# Altium PCB Node_1.PcbDoc
Units mm, origin at the board's own origin, x right, y up, seen from the top; angles counter-clockwise.
Board outline 100.8 x 72.5 mm, 2 copper layers (Top Layer, Bottom Layer), stack 0.325 mm thick; 104 components, 99 nets, 447 pads, 16 vias.
Unrouted connection lines stored in the file: 1.
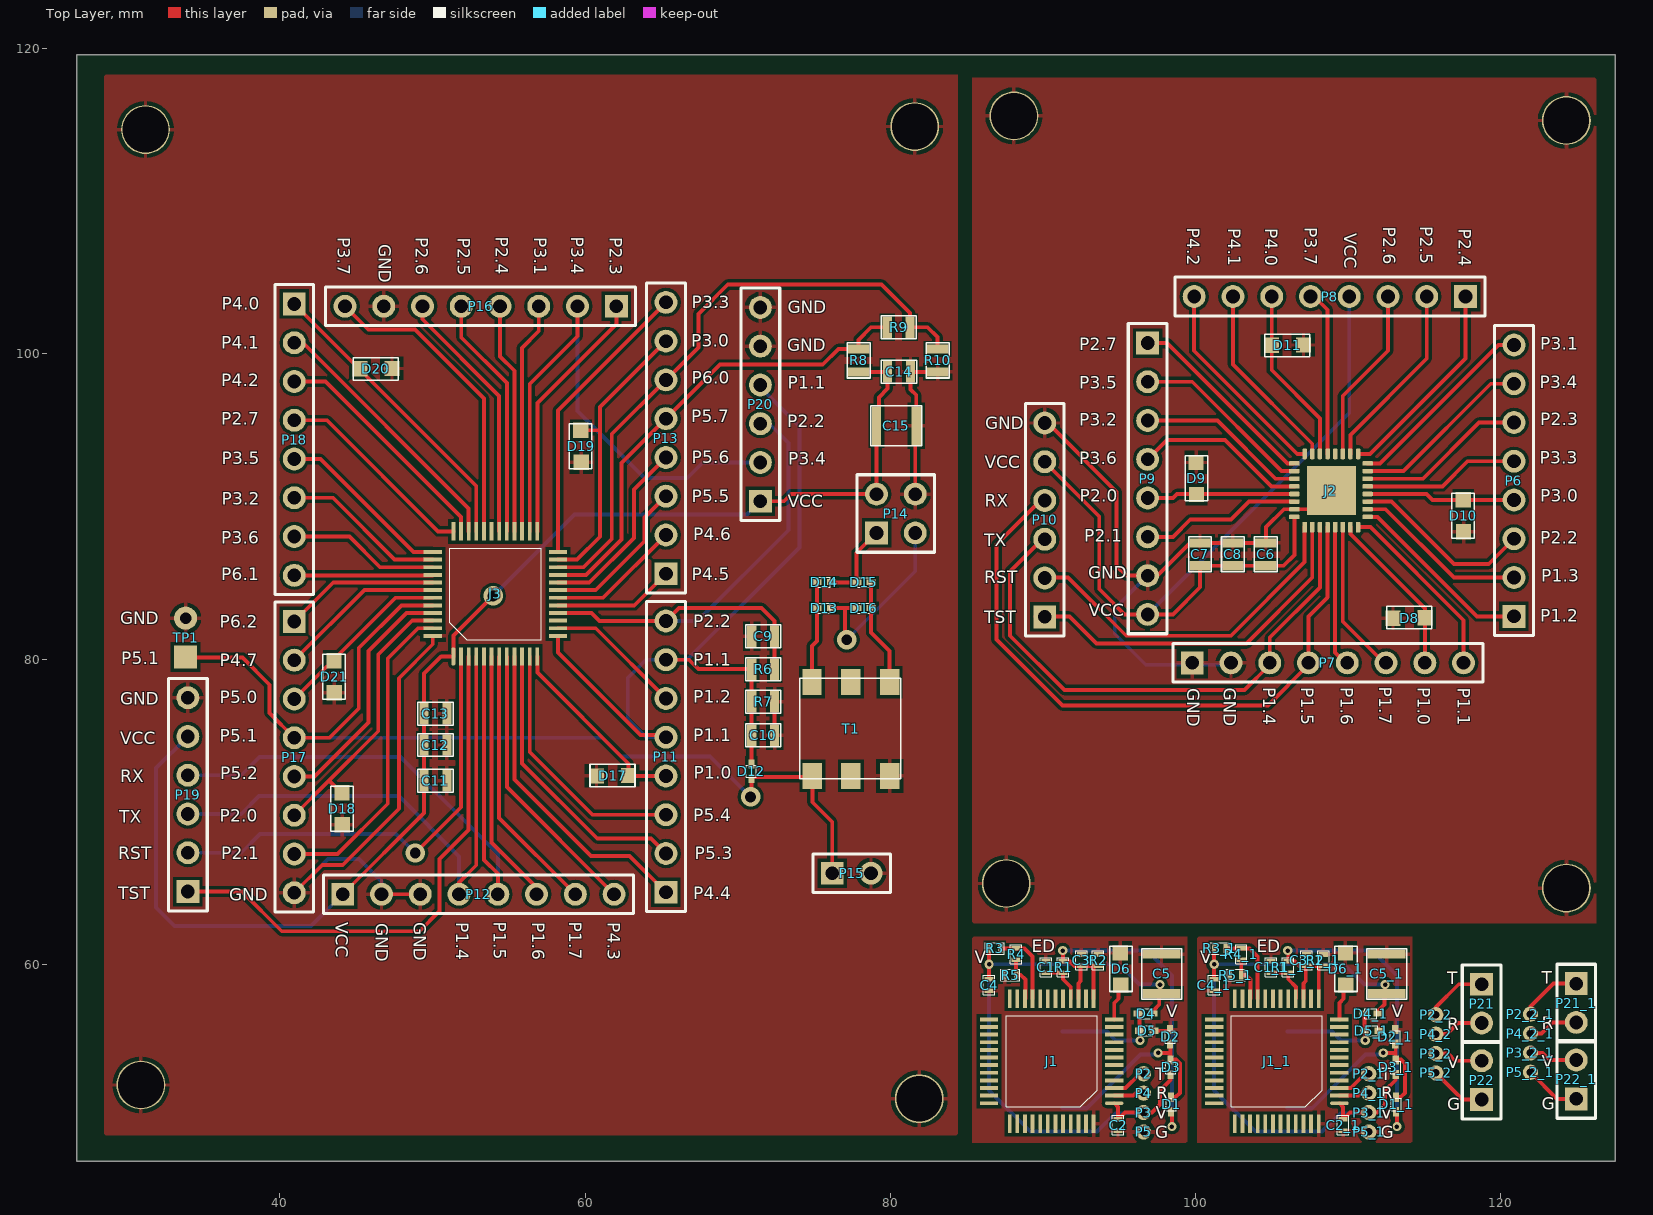
[diagram p0: Top Layer view]
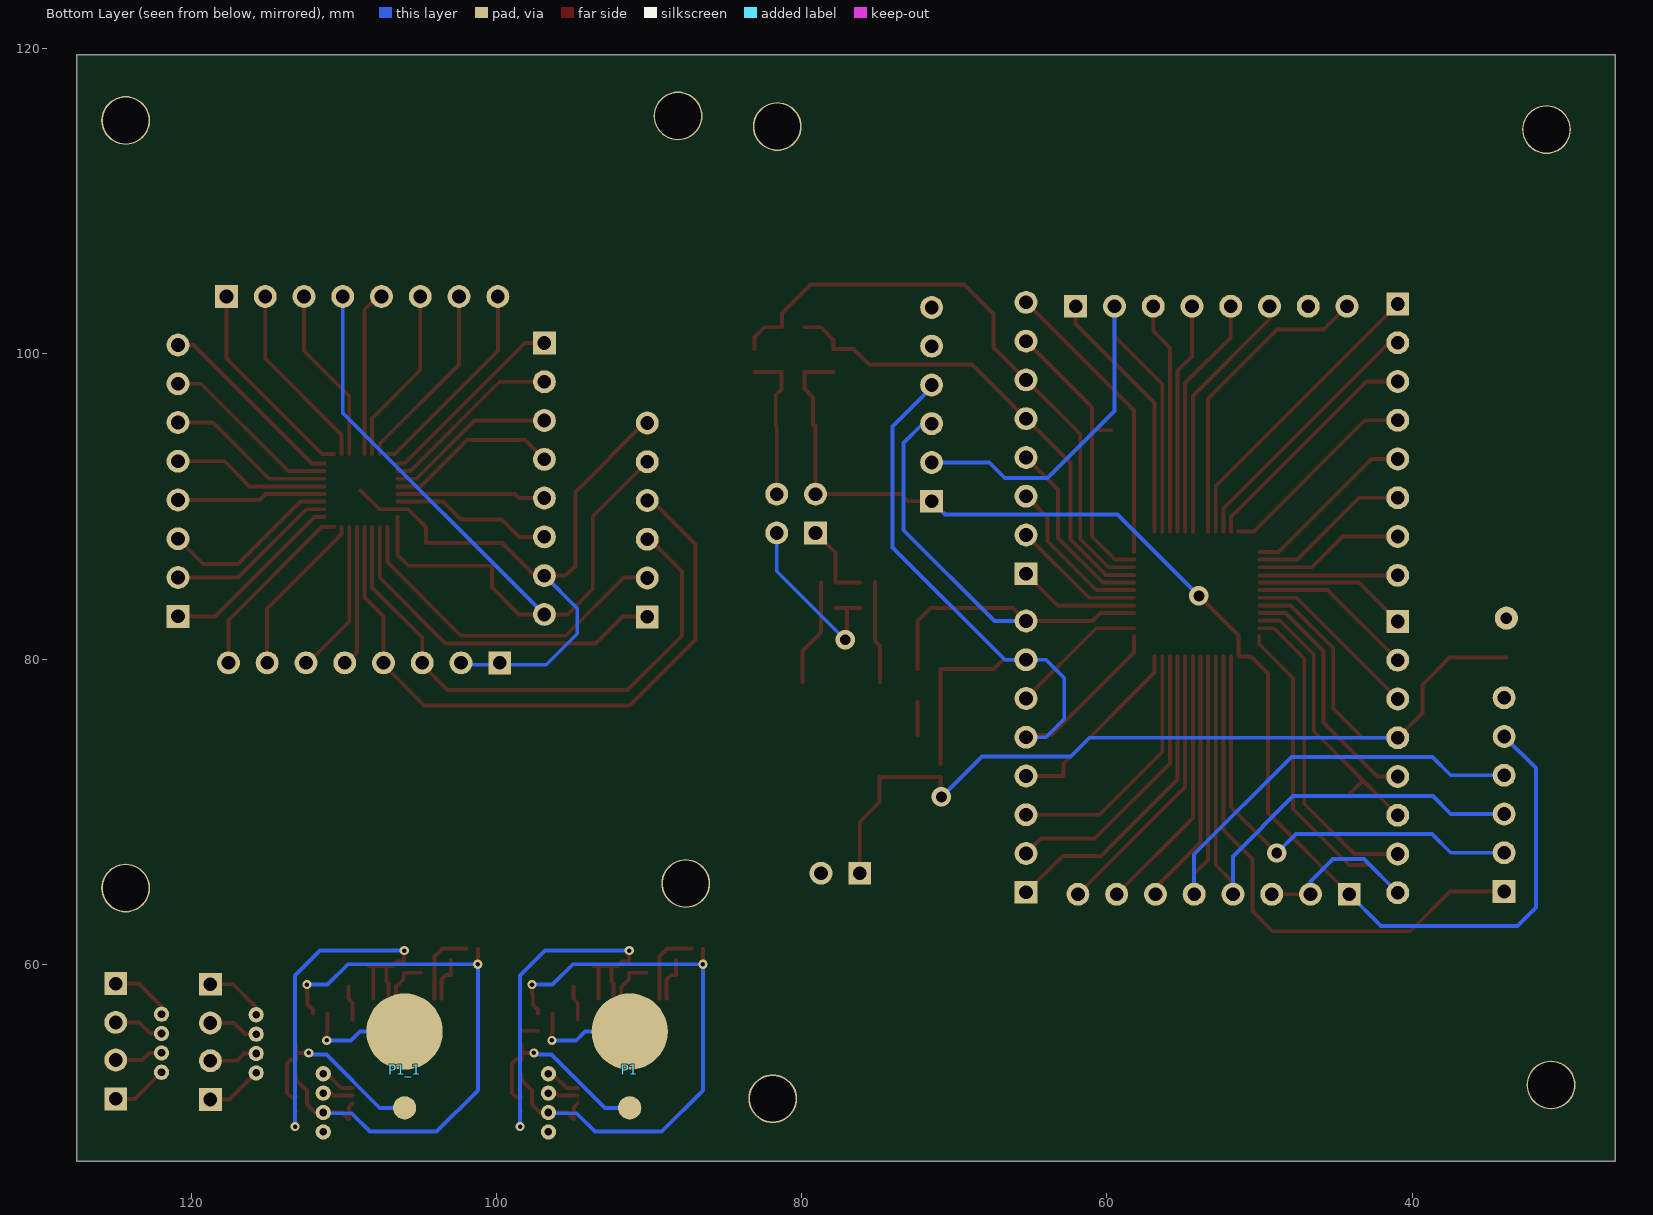
[diagram p1: Bottom Layer view, seen from below]

## Layer stack, top to bottom
Top Solder: solder mask 0.0102, Solder Resist, Dk 3.5
Top Layer: signal copper 0.0356
Dielectric 1: core 0.254, FR-4, Dk 4.2
Bottom Layer: signal copper 0.0356
Bottom Solder: solder mask 0.0102, Solder Resist, Dk 3.5

## Board outline
26.7,47.1 127.5,47.1 127.5,119.6 26.7,119.6

## Design rules (kind name [scope] priority, off if disabled: settings)
Clearance [All] p1: gap=0.2 except(0.1: Arc-Arc Arc-Track Arc-Via Arc-SMDPad THPad-Via Via-Via Track-SMDPad Track-Track SMDPad-Via Track-Via Arc-THPad Track-THPad SMDPad-SMDPad THPad-THPad SMDPad-THPad)
PolygonConnect [All] p1: connectstyle=Relief reliefconductorwidth=0.254 reliefentries=4 polygonreliefangle="90 Angle" airgapwidth=0.254
RoutingVias [All] p1: holewidth=0.711 width=1.27 viastyle="Through Hole" minholewidth=0.2 minwidth=0.5 maxholewidth=1 maxwidth=2
SolderMaskExpansion [All] p1: expansion=0.102
UnpouredPolygon [All] p1: allowunpoured=FALSE
Width [All] p1: maxlimit=1 minlimit=0.127 preferedwidth=0.254
29 further rules are at their usual default settings.

## Components (designator, comment, footprint, x,y, rotation, side; value= is the part's Value field where it differs from the comment)
C1 "Cap" 0402 90.2,59.825 r270 top
C1_1 "Cap" 0402 104.95,59.825 r270 top (schematic designator C1)
C2 "Cap" 0402 94.925,49.475 r90 top
C2_1 "Cap" 0402 109.675,49.475 r90 top (schematic designator C2)
C3 "Cap" 0402 92.525,60.275 r270 top
C3_1 "Cap" 0402 107.275,60.275 r270 top (schematic designator C3)
C4 "Cap" 0402 86.475,58.65 r90 top
C4_1 "Cap" 0402 101.225,58.65 r90 top (schematic designator C4)
C5 "Cap" 1210 97.775,60.675 r270 top
C5_1 "Cap" 1210 112.525,60.675 r270 top (schematic designator C5)
C6 "Cap" 0805 104.613,86.872 r270 top
C7 "Cap" 0805 100.295,86.872 r270 top
C8 "Cap" 0805 102.454,86.872 r270 top
C9 "Cap" 0805 71.675,81.5 r0 top
C10 "Cap" 0805 71.675,75.025 r180 top
C11 "Cap" 0805 50.2,72.025 r180 top
C12 "Cap" 0805 50.2,74.375 r180 top
C13 "Cap" 0805 50.2,76.425 r180 top
C14 "Cap" 0805 80.575,98.825 r180 top
C15 "Cap" 1210 81.7,95.3 r180 top
D1 "D Schottky" Diode2 98.4,51.225 r270 top
D1_1 "D Schottky" Diode2 113.15,51.225 r270 top (schematic designator D1)
D2 "D Schottky" Diode2 98.34,55.65 r270 top
D2_1 "D Schottky" Diode2 113.09,55.65 r270 top (schematic designator D2)
D3 "D Schottky" Diode2 98.375,53.65 r270 top
D3_1 "D Schottky" Diode2 113.125,53.65 r270 top (schematic designator D3)
D4 "D Schottky" Diode2 96.325,56.775 r0 top
D4_1 "D Schottky" Diode2 111.075,56.775 r0 top (schematic designator D4)
D5 "D Schottky" Diode2 97.2,55.65 r180 top
D5_1 "D Schottky" Diode2 111.95,55.65 r180 top (schematic designator D5)
D6 "LED3" LED_mini 95.075,60.7 r270 top
D6_1 "LED3" LED_mini 109.825,60.7 r270 top (schematic designator D6)
D8 "LED3" LED_mini 112.995,82.681 r0 top
D9 "LED3" LED_mini 100.041,92.841 r270 top
D10 "LED3" LED_mini 117.567,88.396 r90 top
D11 "LED3" LED_mini 107.026,100.588 r180 top
D12 "D Schottky" Diode2 70.9,72.25 r90 top
D13 "D Schottky" Diode2 76.075,83.35 r180 top
D14 "D Schottky" Diode2 75.275,85.05 r0 top
D15 "D Schottky" Diode2 78.675,85.025 r180 top
D16 "D Schottky" Diode2 77.875,83.35 r0 top
D17 "LED3" LED_mini 60.8,72.35 r0 top
D18 "LED3" LED_mini 44.1,69.2 r90 top
D19 "LED3" LED_mini 59.75,92.95 r90 top
D20 "LED3" LED_mini 47.3,99.05 r180 top
D21 "LED3" LED_mini 43.575,77.85 r90 top
J1 "MCU" LQFP48 94.675,50.9 r180 top
J1_1 "MCU" LQFP48 109.425,50.9 r180 top (schematic designator J1)
J2 "MCU" VQFN32 107.153,88.65 r90 top
J3 "MCU" LQFP48 51.375,80.175 r90 top
P1 "Header 2" PZT1 91.275,50.6 r90 bottom
P1_1 "Header 2" PZT1 106.025,50.6 r90 bottom (schematic designator P1)
P2 "Header1" "Header 1"#1 100.35,54.225 r0 top
P2_1 "Header1" "Header 1"#1 115.1,54.225 r0 top (schematic designator P2)
P2_2 "Header1" "Header 1"#1 119.5,58.09 r0 top (schematic designator P2)
P2_2_1 "Header1" "Header 1"#1 125.7,58.13 r0 top (schematic designator P2)
P3 "Header1" "Header 1"#2 96.675,50.725 r0 top
P3_1 "Header1" "Header 1"#2 111.425,50.725 r0 top (schematic designator P3)
P3_2 "Header1" "Header 1"#2 115.825,54.59 r0 top (schematic designator P3)
P3_2_1 "Header1" "Header 1"#2 122.025,54.63 r0 top (schematic designator P3)
P4 "Header1" "Header 1"#3 97.575,52.575 r0 top
P4_1 "Header1" "Header 1"#3 112.325,52.575 r0 top (schematic designator P4)
P4_2 "Header1" "Header 1"#3 116.725,56.44 r0 top (schematic designator P4)
P4_2_1 "Header1" "Header 1"#3 122.925,56.48 r0 top (schematic designator P4)
P5 "Header1" "Header 1"#4 96.65,49.25 r0 top
P5_1 "Header1" "Header 1"#4 111.4,49.25 r0 top (schematic designator P5)
P5_2 "Header1" "Header 1"#4 115.8,53.115 r0 top (schematic designator P5)
P5_2_1 "Header1" "Header 1"#4 122,53.155 r0 top (schematic designator P5)
P6 "Header 8" HDR1X8 120.869,82.808 r90 top
P7 "Header 8" HDR1X8 99.787,79.76 r0 top
P8 "Header 8" HDR1X8 117.694,103.763 r180 top
P9 "Header 8" HDR1X8 96.866,100.715 r270 top
P10 "Header 6" HDR1X6 90.125,82.775 r90 top
P11 "Header 8" HDR1X8 65.3,64.725 r90 top
P12 "Header 8" HDR1X8 44.125,64.6 r0 top
P13 "Header 8" HDR1X8 65.3,85.6 r90 top
P14 "Header 2X2" HDR2X2 79.1,88.275 r0 top
P15 "Header 2" HDR1X2 76.2,65.975 r0 top
P16 "Header 8" HDR1X8 62.05,103.125 r180 top
P17 "Header 8" HDR1X8 40.95,82.475 r270 top
P18 "Header 8" HDR1X8 40.95,103.275 r270 top
P19 "Header 6" HDR1X6 33.975,64.775 r90 top
P20 "Header 6" HDR1X6 71.487,90.35 r90 top
P21 "Header 2" HDR1X2 118.75,58.7 r270 top (schematic designator P15)
P21_1 "Header 2" HDR1X2 124.95,58.74 r270 top (schematic designator P15)
P22 "Header 2" HDR1X2 118.75,51.15 r90 top (schematic designator P15)
P22_1 "Header 2" HDR1X2 124.95,51.19 r90 top (schematic designator P15)
R1 "Res1" 0402 91.325,59.825 r270 top
R1_1 "Res1" 0402 106.075,59.825 r270 top (schematic designator R1)
R2 "Res1" 0402 93.625,60.275 r90 top
R2_1 "Res1" 0402 108.375,60.275 r90 top (schematic designator R2)
R3 "Res1" 0402 86.85,61.05 r180 top
R3_1 "Res1" 0402 101.6,61.05 r180 top (schematic designator R3)
R4 "Res1" 0402 88.25,60.675 r90 top
R4_1 "Res1" 0402 103,60.675 r90 top (schematic designator R4)
R5 "Res1" 0402 87.875,59.3 r180 top
R5_1 "Res1" 0402 102.625,59.3 r180 top (schematic designator R5)
R6 "Res1" 0805 71.675,79.35 r0 top
R7 "Res1" 0805 71.675,77.2 r0 top
R8 "Res1" 0805 77.925,99.575 r270 top
R9 "Res1" 0805 80.55,101.75 r180 top
R10 "Res1" 0805 83.1,99.575 r270 top
T1 "Transformer" Transformer1 74.875,72.5 r90 top
TP1 "Test_Point" Test_Point 33.825,80.15 r90 top

## Footprints (in the part's own frame and the unit in brackets; to place one, negate y for a bottom-side part, rotate by r counter-clockwise, add the part's x,y. Pads: shape width x height; smd on the part's side, far side on the other; paste and mask are expansions set on the pad)
0402 [mm]
  rect 0.3x0.6 smd: 1(-0.375,0) 2(0.375,0)
  silkscreen extent -0.63,-0.38 0.63,0.38
0805 [mm]
  rect 0.6x1.4 smd: 1(-0.75,0) 2(0.75,0)
  silkscreen extent -1.15,-0.75 1.15,0.75
1210 [mm]
  rect 0.6x2.5 smd: 1(0,0) 2(2.6,0)
  silkscreen extent -0.36,-1.3 2.97,1.32
Diode2 [mm] "PMEG2010AEB"
  rect 0.6x0.4 smd mask+0.05: 1(-0.075,0) 2(0.875,0)
  silkscreen extent 0,-0.32 0.8,0.33
HDR1X2 [mm] "Connector; Header; 2 Position"
  rect 1.5x1.5 hole 0.9: 1(0,0)
  round 1.5 hole 0.9: 2(2.54,0)
  silkscreen extent -1.27,-1.27 3.81,1.27
HDR1X6 [mm] "Connector; Header; 6 Position"
  rect 1.5x1.5 hole 0.9: 1(0,0)
  round 1.5 hole 0.9: 2(2.54,0) 3(5.08,0) 4(7.62,0) 5(10.16,0) 6(12.7,0)
  silkscreen extent -1.27,-1.27 13.97,1.27
HDR1X8 [mm] "Connector; Header; 8 Position"
  rect 1.5x1.5 hole 0.9: 1(0,0)
  round 1.5 hole 0.9: 2(2.54,0) 3(5.08,0) 4(7.62,0) 5(10.16,0) 6(12.7,0) 7(15.24,0) 8(17.78,0)
  silkscreen extent -1.27,-1.27 19.05,1.27
HDR2X2 [mm] "Connector; Header; 2x2 Position"
  rect 1.5x1.5 hole 0.9: 1(0,0)
  round 1.5 hole 0.9: 2(0,2.54) 3(2.54,0) 4(2.54,2.54)
  silkscreen extent -1.27,-1.27 3.81,3.81
"Header 1"#1 [mm]
  round 1 hole 0.5 mask+0.05: 1(-3.75,-1.39)
"Header 1"#2 [mm]
  round 1 hole 0.5 mask+0.05: 1(-0.075,-0.43)
"Header 1"#3 [mm]
  round 1 hole 0.5 mask+0.05: 1(-0.975,-1.01)
"Header 1"#4 [mm]
  round 1 hole 0.5 mask+0.05: 1(-0.05,-0.225)
LED_mini [mm]
  rect 1x1 smd: 1(-0.05,0) 2(2.05,0.025)
  silkscreen extent -0.48,-0.7 2.47,0.77
LQFP48 [mm]
  oval 1.2x0.25 smd mask+0.05: 1(0,0)
  rect 1.2x0.25 smd mask+0.05: 2(0,-0.5) 3(0,-1) 4(0,-1.5) 5(0,-2) 6(0,-2.5) 7(0,-3) 8(0,-3.5) 9(0,-4) 10(0,-4.5) 11(0,-5) 12(0,-5.5) 25(8.2,-5.5) 26(8.2,-5) 27(8.2,-4.5) 28(8.2,-4) 29(8.2,-3.5) 30(8.2,-3) 31(8.2,-2.5) 32(8.2,-2) 33(8.2,-1.5) 34(8.2,-1) 35(8.2,-0.5) 36(8.2,0)
  rect 0.25x1.2 smd mask+0.05: 13(1.35,-6.85) 14(1.85,-6.85) 15(2.35,-6.85) 16(2.85,-6.85) 17(3.35,-6.85) 18(3.85,-6.85) 19(4.35,-6.85) 20(4.85,-6.85) 21(5.35,-6.85) 22(5.85,-6.85) 23(6.35,-6.85) 24(6.85,-6.85) 37(6.85,1.35) 38(6.35,1.35) 39(5.85,1.35) 40(5.35,1.35) 41(4.85,1.35) 42(4.35,1.35) 43(3.85,1.35) 44(3.35,1.35) 45(2.85,1.35) 46(2.35,1.35) 47(1.85,1.35) 48(1.35,1.35)
  silkscreen extent 1.11,-5.74 7.09,0.24
PZT1 [mm]
  round 1.524 smd: 1(0,0)
  round 5 smd: 2(5,0)
Test_Point [mil]
  rect 60x60 smd paste+0 mask+0: 1(0,0)
  round 60 hole 30: 2(100,0)
Transformer1 [mm]
  rect 1.7x1.27 smd: 1(-0.15,-0.025) 2(-0.15,-2.54) 3(-0.15,-5.08) 4(6,-5.08) 5(6,-2.54) 6(6,0)
  silkscreen extent -0.35,-5.82 6.25,0.8
VQFN32 [mm]
  rect 0.7x0.3 smd mask+0.05: 1(0,0)
  rrect50% 0.7x0.3 smd mask+0.05: 2(0,-0.5) 3(0,-1) 4(0,-1.5) 5(0,-2) 6(0,-2.5) 7(0,-3) 8(0,-3.5) 17(4.8,-3.5) 18(4.8,-3) 19(4.8,-2.5) 20(4.8,-2) 21(4.8,-1.5) 22(4.8,-1) 23(4.8,-0.5) 24(4.8,0)
  rrect50% 0.3x0.7 smd mask+0.05: 9(0.675,-4.125) 10(1.175,-4.125) 11(1.675,-4.125) 12(2.175,-4.125) 13(2.675,-4.125) 14(3.175,-4.125) 15(3.675,-4.125) 16(4.175,-4.125) 25(4.175,0.675) 26(3.675,0.675) 27(3.175,0.675) 28(2.675,0.675) 29(2.175,0.675) 30(1.675,0.675) 31(1.175,0.675) 32(0.675,0.675)
  rect 3.2x3.2 smd: 33(2.4,-1.75)

## Part data
C1 C1_1 C2 C2_1 C3 C3_1 C4 C4_1 C5 C5_1 C6 C7 C8 C9 C10 C11 C12 C13 C14 C15: "Capacitor"
D1 D1_1 D2 D2_1 D3 D3_1 D4 D4_1 D5 D5_1 D12 D13 D14 D15 D16: "Schottky Diode"
D6 D6_1 D8 D9 D10 D11 D17 D18 D19 D20 D21: "Typical BLUE SiC LED"
J1 J1_1 J3: library part MSP430FR2476_48pin, "MSP430FR2476"
J2: library part MSP430FR2476_32pin, "MSP430FR2476"
P1 P1_1 P15 P21 P21_1 P22 P22_1: "Header, 2-Pin"
P2 P2_1 P2_2 P2_2_1 P3 P3_1 P3_2 P3_2_1 P4 P4_1 P4_2 P4_2_1 P5 P5_1 P5_2 P5_2_1: library part "Header 1"
P6 P7 P8 P9 P11 P12 P13 P16 P17 P18: "Header, 8-Pin"
P10 P19 P20: "Header, 6-Pin"
P14: "Header, 2-Pin, Dual row"
R1 R1_1 R2 R2_1 R3 R3_1 R4 R4_1 R5 R5_1 R6 R7 R8 R9 R10: "Resistor"

## Free pads (board coordinates)
  round 3.2 hole 3: 0(30.9,52.1) 0(31.2,114.7) 0(81.6,114.9) 0(81.9,51.2) 0(87.6,65.3) 0(88.1,115.6) 0(124.3,65) 0(124.3,115.3)

## Via types
v1: diameter 0.6, hole 0.3, Top Layer to Bottom Layer, 12 vias
v2: diameter 1.27, hole 0.711, Top Layer to Bottom Layer, 4 vias

## Nets (pads, with @x,y where several pads share a name; then routed paths per layer and width w, separated by ;. In a path a pad name is that pad's centre, name@x,y a point inside that pad or via, vN(x,y) a via of type N, cw(c..) or ccw(c..) an arc to the next point about the centre after c; other vN are vias at no path point)
COMP_OUT: J1.26
ED1: C3.2 D1.2 J1.13 J1.15 R1.1 R2.1 | length 26.2
  Top Layer w0.254: v1(91.3,60.9) 91.325,60.875 R1.1 91.775,60.2 92.075,59.9 C3.2@92.475,59.9 ; J1.15 92.325,58.75 92.475,58.9 C3.2@92.475,59.9 ; J1.13 93.325,59.875 ; R2.1 C3.2 C3.2@92.475,59.9 ; D1.2 98.45,50.3 v1(98.45,49.375)
  Bottom Layer w0.254: v1(91.3,60.9) 96.825,60.9 98.45,59.275 v1(98.45,49.375)
ED2: C1.2 J1.16 R1.2 | length 3.1
  Top Layer w0.254: C1.2@90.175,59.45 R1.2 91.325,59.025 91.825,58.525 J1.16
GND: C1.1 C2.1 C3.1 C4.1 C5.1 D2.1 D5.1 D6.1 J1.48 P5.1 R2.2 R5.2 | length 1.1
  Top Layer w0.254: D5.1 D2.1@98.34,55.65
GND2: C9.1 C10.1 C11.1 C12.1 C13.1 C14.1 C15.1 D17.1 D18.1 D19.1 D20.1 D21.1 J3.48 P12.2 P12.3 P14.4 P15.2 P16.7 P17.8 P19.6 P20.5 P20.6 pad.0@30.9,52.1 pad.0@31.2,114.7 pad.0@81.6,114.9 pad.0@81.9,51.2 R7.2 R10.2 T1.3 TP1.2 | length 44
  Top Layer w0.254: P17.8 42.78,66.525 44.125,66.525 47.8,70.2 47.8,78.75 50.025,80.975 J3.48 ; P12.2 P12.3 ; C10.1 R7.2 ; P14.4 C15.1@81.64,95.24 ; C15.1 81.7,97.3 81.325,97.675 C14.1 R10.2
  Bottom Layer w0.254: P17.8 43.155,66.9 45.2,66.9 46.665,65.435 P12.2
GND3: C6.1 C7.1 C8.1 D8.1 D9.1 D10.1 D11.1 J2.31 J2.33 P7.1 P7.2 P9.7 P10.6 pad.0@87.6,65.3 pad.0@88.1,115.6 pad.0@124.3,65 pad.0@124.3,115.3 | length 42.5
  Top Layer w0.254: P10.6@89.5,95.508 90.292,95.508 94.834,90.966 94.834,86.11 95.469,85.475 P9.7 97.501,85.475 99.648,87.622 C7.1 C8.1 C6.1 104.613,88.65 105.788,89.825 J2.31 107.678,89.825 J2.33
  Bottom Layer w0.254: P9.7 94.707,83.316 94.707,81.665 96.739,79.633 P7.2@102.327,79.633
GND4: C1_1.1 C2_1.1 C3_1.1 C4_1.1 C5_1.1 D2_1.1 D5_1.1 D6_1.1 J1_1.48 P5_1.1 R2_1.2 R5_1.2
GND5: P5_2.1 P22.1 | length 3.7
  Top Layer w0.254: P5_2.1 117.49,51.15 P22.1@118.775,51.15
LED1: D6.2 J1.12 | length 2.3
  Top Layer w0.254: J1.12 94.675,57.475 94.95,57.75 D6.2@94.95,58.55
NetD1_1: D1.1 D2.2 D3.1 P1.1 | length 12.8
  Top Layer w0.254: v1(97.55,54.2) 98.325,54.2 ; D3.1 D3.1@98.375,53.76 ; D2.2@98.375,54.74 D3.1@98.375,53.76 ; D1.1 98.7,51.3 98.975,51.575 98.975,53.5 98.715,53.76 D3.1@98.375,53.76
  Bottom Layer w0.254: P1.1 92.9,50.6 96.4,54.1 v1@97.55,54.1
NetD4_1: D4.1 D5.2 P1.2 | length 7.1
  Top Layer w0.254: D4.1@96.325,56.775 D5.2 96.375,55.6 v1(96.375,55.025)
  Bottom Layer w0.254: P1.2 94.2,55.6 94.775,55.025 v1(96.375,55.025)
NetD13_1: D13.1 D16.1 P14.3 | length 12.6
  Top Layer w0.254: D13.1 77.025,83.35 ; v2(77.15,81.275) 77.025,81.4 77.025,83.35 ; D16.1 77.025,83.35
  Bottom Layer w0.254: v2(77.15,81.275) 81.64,85.765 P14.3
NetD13_2: D13.2 D14.1 T1.6 | length 6.7
  Top Layer w0.254: T1.6 74.875,80.875 75.2,81.2 D13.2 D14.1
NetD14_2: D14.2 D15.2 P14.1 | length 5.4
  Top Layer w0.254: D14.2@76.175,85.025 D15.2 77.8,86.975 P14.1
NetD15_1: D15.1 D16.2 T1.4 | length 7
  Top Layer w0.254: D15.1 D16.2 78.75,81.75 79.955,80.545 T1.4
P1.0: D17.2 J3.12 P11.4 | length 12.7
  Top Layer w0.254: J3.12 56.875,79.125 62.85,73.15 D17.2 ; D17.2@62.88,72.345 P11.4
P1.1: C10.2 D12.2 J3.13 J3.15 P11.5 P11.7 P20.4 R6.1 R7.1 | length 54.8
  Top Layer w0.254: J3.13 58.225,80.425 63.625,75.025 65.16,75.025 P11.5 ; P11.7 66.81,79.965 67.425,79.35 R6.1 ; D12.2 R6.1@70.9,79.325
  Bottom Layer w0.254: P11.5 63.99,74.885 62.8,76.075 62.8,78.775 63.99,79.965 P11.7 66.69,79.965 74.05,87.325 74.05,95.25 P20.4@71.33,97.97
P1.2: J3.14 P11.6 | length 9
  Top Layer w0.254: J3.14 60.7,82.025 P11.6
P1.4: J3.4 P12.4 P19.3 | length 38.4
  Top Layer w0.254: P12.4 51.745,65.37 52.875,66.5 J3.4
  Bottom Layer w0.254: P19.3 37.475,69.855 38.645,71.025 47.8,71.025 51.745,67.08 P12.4
P1.5: J3.5 P12.5 P19.4 | length 42
  Top Layer w0.254: J3.5 53.375,66.85 54.285,65.94 P12.5
  Bottom Layer w0.254: P19.4 37.475,72.395 38.68,73.6 47.9,73.6 54.285,67.215 P12.5
P1.6: J3.6 P12.6 | length 16.8
  Top Layer w0.254: J3.6 53.875,68 56.825,65.05 P12.6
P1.7: J3.7 P12.7 | length 17.6
  Top Layer w0.254: J3.7 54.375,69.59 P12.7
P2.0: D18.2 J3.46 P17.6 | length 18.5
  Top Layer w0.254: P17.6 43.225,72.05 ; D18.2 44.025,71.25 43.225,72.05 ; J3.46 48.675,82.525 46.45,80.3 46.45,75.275 43.225,72.05
P2.1: J3.47 P17.7 | length 20.8
  Top Layer w0.254: P17.7 43.785,67.235 47.075,70.525 47.075,80.05 49.05,82.025 J3.47
P2.2: C9.2 J3.16 P11.8 P20.3 R6.2 | length 36.8
  Top Layer w0.254: J3.16 60.425,83.025 60.945,82.505 P11.8 66.145,83.35 71.575,83.35 72.425,82.5 C9.2 R6.2
  Bottom Layer w0.254: P11.8 67.38,82.505 73.325,88.45 73.325,94.175 72.07,95.43 P20.3
P2.3: J3.25 P16.1 | length 16.9
  Top Layer w0.254: J3.25 56.875,96.775 62.05,101.95 P16.1
P2.4: J3.28 P16.4 | length 15.1
  Top Layer w0.254: P16.4 54.43,99.845 55.375,98.9 J3.28
P2.5: J3.29 P16.5 | length 16
  Top Layer w0.254: P16.5 51.89,101.085 54.875,98.1 J3.29
P2.6: J3.30 P16.6 | length 16.8
  Top Layer w0.254: P16.6 49.35,102.275 54.375,97.25 J3.30
P2.7: J3.36 P18.4 | length 13.4
  Top Layer w0.254: P18.4 43.095,95.655 50.375,88.375 J3.36
P3.0: D19.2 J3.23 P13.7 | length 19.2
  Top Layer w0.254: J3.23 59.475,86.525 60.975,88.025 60.975,96.515 P13.7 ; D19.2 60.95,95
P3.1: J3.27 P16.3 | length 15.2
  Top Layer w0.254: J3.27 55.875,100.4 56.97,101.495 P16.3
P3.2: J3.38 P18.6 | length 10.8
  Top Layer w0.254: P18.6 43.475,90.575 47.525,86.525 J3.38
P3.3: J3.24 P13.8 | length 19.3
  Top Layer w0.254: J3.24 58.225,96.305 P13.8
P3.4: J3.26 P16.2 P20.2 | length 37.1
  Top Layer w0.254: J3.26 56.375,98.025 59.51,101.16 P16.2
  Bottom Layer w0.254: P16.2 59.51,96.265 63.9,91.875 66.7,91.875 67.715,92.89 P20.2
P3.5: J3.37 P18.5 | length 11.6
  Top Layer w0.254: P18.5 42.66,93.115 48.75,87.025 J3.37
P3.6: J3.39 P18.7 | length 9.9
  Top Layer w0.254: P18.7 44.565,88.035 46.575,86.025 J3.39
P3.7: J3.32 P16.8 | length 20.3
  Top Layer w0.254: P16.8 45.795,101.6 48.85,101.6 53.375,97.075 J3.32
P4.0: D20.2 J3.33 P18.1 | length 19.8
  Top Layer w0.254: P18.1 52.875,91.35 J3.33
P4.1: J3.34 P18.2 | length 17.4
  Top Layer w0.254: P18.2 41.515,100.735 52.375,89.875 J3.34
P4.2: J3.35 P18.3 | length 15.5
  Top Layer w0.254: P18.3 43.005,98.195 51.875,89.325 J3.35
P4.3: J3.8 P12.8 | length 18.5
  Top Layer w0.254: J3.8 54.875,71.63 P12.8
P4.4: J3.9 P11.1 | length 21
  Top Layer w0.254: J3.9 55.375,72.125 60.4,67.1 62.925,67.1 P11.1
P4.5: J3.17 P13.1 | length 7.9
  Top Layer w0.254: J3.17 63.225,83.525 P13.1
P4.6: J3.18 P13.2 | length 8.8
  Top Layer w0.254: J3.18 61.185,84.025 P13.2
P4.7: J3.42 P17.2 | length 11
  Top Layer w0.254: P17.2 45.54,84.525 J3.42
P5.0: D21.2 J3.43 P17.3 | length 11.8
  Top Layer w0.254: P17.3 42.5,78.945 47.58,84.025 J3.43
P5.1: D12.1 J3.44 P15.1 P17.4 T1.1 TP1.1 | length 68.9
  Top Layer w0.254: TP1.1@33.825,80.1 37.55,80.1 39.325,78.325 39.325,76.48 P17.4 43.255,74.855 45.175,76.775 45.175,80.725 47.975,83.525 J3.44 ; v2(70.85,70.975) 70.9,71.025 D12.1 ; D12.1@70.875,72.275 74.9,72.275 74.9,70.625 76.2,69.325 P15.1
  Bottom Layer w0.254: P17.4 61.145,74.855 62.375,73.625 68.2,73.625 v2(70.85,70.975)
P5.2: J3.45 P17.5 | length 16.2
  Top Layer w0.254: P17.5 42.265,72.315 45.8,75.85 45.8,80.525 48.3,83.025 J3.45
P5.3: J3.10 P11.2 | length 18.9
  Top Layer w0.254: J3.10 55.875,73.175 60.8,68.25 64.315,68.25 P11.2
P5.4: J3.11 P11.3 | length 16.9
  Top Layer w0.254: J3.11 56.375,73.925 60.495,69.805 P11.3
P5.5: J3.19 P13.3 | length 10.5
  Top Layer w0.254: J3.19 60.7,84.525 63.9,87.725 63.9,89.28 P13.3
P5.6: J3.20 P13.4 | length 12.3
  Top Layer w0.254: J3.20 60.275,85.025 63.2,87.95 63.2,91.12 P13.4
P5.7: J3.21 P13.5 R8.1 R9.2 | length 31.6
  Top Layer w0.254: J3.21 60.075,85.525 62.4,87.85 62.4,92.86 P13.5 68.84,99.3 75.575,99.3 76.6,100.325 R8.1 77.925,100.925 78.75,101.75 R9.2
P6.0: J3.22 P13.6 R9.1 R10.1 | length 40.6
  Top Layer w0.254: J3.22 59.9,86.025 61.75,87.875 61.75,94.75 P13.6 67.425,100.425 67.425,102.625 69.35,104.55 79.425,104.55 81.3,102.675 R9.1 82.45,101.75 83.1,101.1 R10.1
P6.1: J3.40 P18.8 | length 9
  Top Layer w0.254: P18.8 J3.40@49.995,85.495
P6.2: J3.41 P17.1 | length 10.1
  Top Layer w0.254: P17.1 43.5,85.025 J3.41
PP1.0: D8.2 J2.7 P7.7 | length 11
  Top Layer w0.254: J2.7 110.153,88.19 115.027,83.316 P7.7@115.027,79.633
PP1.1: J2.8 P7.8 | length 12.2
  Top Layer w0.254: J2.8 111.471,88.65 117.567,82.554 P7.8
PP1.2: J2.9 P6.1 | length 12.3
  Top Layer w0.254: J2.9 111.939,89.325 118.456,82.808 P6.1
PP1.3: J2.10 P6.2 | length 11.4
  Top Layer w0.254: J2.10 112.455,89.825 116.932,85.348 P6.2
PP1.4: J2.3 P7.3 P10.3 | length 36.9
  Top Layer w0.254: P10.3@90.04,87.94 87.849,85.749 87.849,81.538 91.405,77.982 103.216,77.982 104.867,79.633 104.867,81.411 108.153,84.697 J2.3
PP1.5: J2.4 P7.4 P10.4 | length 43.4
  Top Layer w0.254: P10.4@89.987,90.534 86.96,87.507 86.96,81.284 91.278,76.966 104.74,76.966 107.407,79.633 107.407,82.808 108.653,84.054 J2.4
PP1.6: J2.5 P7.5 | length 9.3
  Top Layer w0.254: J2.5 109.153,80.427 P7.5@109.947,79.633
PP1.7: J2.6 P7.6 | length 10.2
  Top Layer w0.254: J2.6 109.653,82.467 P7.6@112.487,79.633
PP2.0: D9.2 J2.29 P9.5 | length 9.7
  Top Layer w0.254: P9.5 98.517,90.555 98.787,90.825 J2.29
PP2.1: J2.30 P9.6 | length 10.6
  Top Layer w0.254: P9.6 98.517,88.015 99.66,89.158 102.327,89.158 103.494,90.325 J2.30
PP2.2: J2.11 P6.3 | length 12
  Top Layer w0.254: J2.11 112.844,90.325 116.932,86.237 119.218,86.237 P6.3
PP2.3: J2.14 P6.6 | length 11.1
  Top Layer w0.254: J2.14 114.9,91.825 118.583,95.508 P6.6
PP2.4: J2.17 P8.1 | length 13.7
  Top Layer w0.254: J2.17 111.445,93.45 117.694,99.699 P8.1
PP2.5: J2.18 P8.2 | length 12.4
  Top Layer w0.254: J2.18 110.153,94.698 115.154,99.699 P8.2
PP2.6: J2.19 P8.3 | length 11.5
  Top Layer w0.254: J2.19 109.653,97.246 112.614,100.207 P8.3
PP2.7: J2.25 P9.1 | length 12.9
  Top Layer w0.254: P9.1 98.136,100.715 106.026,92.825 J2.25
PP3.0: D10.2 J2.12 P6.4 | length 9.8
  Top Layer w0.254: J2.12 115.138,90.825 115.535,90.428 P6.4
PP3.1: J2.16 P6.8 | length 12.8
  Top Layer w0.254: J2.16 112.09,92.825 119.853,100.588 P6.8
PP3.2: J2.27 P9.3 | length 11.2
  Top Layer w0.254: P9.3 101.438,95.635 105.248,91.825 J2.27
PP3.3: J2.13 P6.5 | length 10.3
  Top Layer w0.254: J2.13 116.178,91.325 117.821,92.968 P6.5
PP3.4: J2.15 P6.7 | length 12
  Top Layer w0.254: J2.15 113.622,92.325 119.345,98.048 P6.7
PP3.5: J2.26 P9.2 | length 12
  Top Layer w0.254: P9.2 99.787,98.175 105.637,92.325 J2.26
PP3.6: J2.28 P9.4 | length 11.4
  Top Layer w0.254: P9.4 98.136,94.365 101.946,94.365 104.986,91.325 J2.28
PP3.7: J2.21 P8.5 | length 10.9
  Top Layer w0.254: P8.5 107.788,103.763 108.653,102.898 J2.21
PP4.0: D11.2 J2.22 P8.6 | length 11.6
  Top Layer w0.254: P8.6 104.994,98.937 108.153,95.778 J2.22
PP4.1: J2.23 P8.7 | length 12.5
  Top Layer w0.254: P8.7 102.454,99.318 107.653,94.119 J2.23
PP4.2: J2.24 P8.8 | length 13.6
  Top Layer w0.254: P8.8 99.914,100.207 106.671,93.45 J2.24
PZT: J1.44
RST: J1.2 P4.1 | length 2
  Top Layer w0.254: J1.2 95.925,51.4 96.09,51.565 P4.1
RST2: J3.2 P19.2 | length 30
  Top Layer w0.254: v2(48.875,67.3) 51.875,70.3 J3.2
  Bottom Layer w0.254: P19.2 37.475,67.315 38.71,68.55 47.625,68.55 v2(48.875,67.3)
RST3: J2.1 P10.2 | length 23.5
  Top Layer w0.254: P10.2@89.5,85.348 91.652,85.348 95.462,81.538 102.327,81.538 107.153,86.364 J2.1
RST5: P4_2.1 P21.2 | length 3.6
  Top Layer w0.254: P4_2.1 116.48,55.43 117.21,56.16 P21.2 P21.2@118.52,55.93
TST: J1.3 P2.1 | length 2.3
  Top Layer w0.254: J1.3 95.425,51.9 96.36,52.835 P2.1
TST2: J3.3 P19.1 | length 35.6
  Top Layer w0.254: P19.1 37.525,64.775 40.125,62.175 49.15,62.175 50.475,63.5 50.475,66.9 52.375,68.8 J3.3
TST3: J2.2 P10.1 | length 24
  Top Layer w0.254: P10.1@89.5,82.808 91.742,82.808 93.52,81.03 103.343,81.03 107.653,85.34 J2.2
TST5: P2_2.1 P21.1 | length 3.6
  Top Layer w0.254: 115.75,57.2 117.25,58.7 P21.1
VCC: C2.2 C4.2 C5.2 D3.2 D4.2 J1.1 P3.1 R3.2 | length 42.5
  Top Layer w0.254: C4.2 v1(86.475,60.012) R3.2@86.475,61 ; J1.1 94.925,50.65 C2.2 95.37,50.295 P3.1 97.145,50.295 97.675,50.825 97.675,51.725 98.375,52.425 D3.2 ; D4.2@97.275,56.775 97.275,57.025 97.625,57.375 C5.2@97.625,58.075 ; C5.2@97.675,58.125 v1(97.675,58.675)
  Bottom Layer w0.254: P3.1@96.752,50.447 P3.1 96.555,50.25 94.75,50.25 93.55,49.05 89.175,49.05 86.475,51.75 v1(86.475,60.012) 94.987,60.012 96.325,58.675 v1(97.675,58.675)
VCC2: C11.2 C12.2 C13.2 C14.2 C15.2 J3.1 P12.1 P14.2 P19.5 P20.1 R8.2 | length 86.7
  Top Layer w0.254: P12.1 49.45,69.925 49.45,79.05 50.575,80.175 J3.1 51.375,81.55 v2(53.975,84.15) ; P20.1 73.05,90.35 73.515,90.815 P14.2 C15.2 ; R8.2 C14.2 79.825,97.725 79.25,97.15 C15.2@79.25,95.3
  Bottom Layer w0.254: P19.5 31.9,72.86 31.9,63.725 33.1,62.525 42.05,62.525 P12.1 ; v2(53.975,84.15) 59.3,89.475 70.612,89.475 70.706,89.569
VCC3: C6.2 C7.2 C8.2 J2.32 P8.4 P9.8 P10.5 | length 55.2
  Top Layer w0.254: P10.5@89.5,92.968 90.082,92.968 93.691,89.359 93.691,84.586 95.342,82.935 P9.8 98.517,82.935 100.295,84.713 C7.2 C8.2 C6.2 105.768,86.122 106.478,86.832 J2.32
  Bottom Layer w0.254: P9.8 110.074,96.143 P8.4
VCC5: P3_2.1 P22.2 | length 3.2
  Top Layer w0.254: P3_2.1 116.54,54.16 117.01,53.69 P22.2@118.775,53.69
VTH1: J1.21 R3.1 R4.2 | length 5.1
  Top Layer w0.254: R3.1 R4.2 88.8,61.05 89.325,60.525 J1.21
VTH2: J1.22 R4.1 R5.1 | length 3
  Top Layer w0.254: R4.1 R5.1 88.55,59.3 88.85,59 88.85,57.775 J1.22
pads on no net: C1_1.2 C2_1.2 C3_1.2 C4_1.2 C5_1.2 D1_1.1 D1_1.2 D2_1.2 D3_1.1 D3_1.2 D4_1.1 D4_1.2 D5_1.2 D6_1.2 J1.4 J1.5 J1.6 J1.7 J1.8 J1.9 J1.10 J1.11 J1.14 J1.17 J1.18 J1.19 J1.20 J1.23 J1.24 J1.25 J1.27 J1.28 J1.29 J1.30 J1.31 J1.32 J1.33 J1.34 J1.35 J1.36 J1.37 J1.38 J1.39 J1.40 J1.41 J1.42 J1.43 J1.45 J1.46 J1.47 J1_1.1 J1_1.2 J1_1.3 J1_1.4 J1_1.5 J1_1.6 J1_1.7 J1_1.8 J1_1.9 J1_1.10 J1_1.11 J1_1.12 J1_1.13 J1_1.14 J1_1.15 J1_1.16 J1_1.17 J1_1.18 J1_1.19 J1_1.20 J1_1.21 J1_1.22 J1_1.23 J1_1.24 J1_1.25 J1_1.26 J1_1.27 J1_1.28 J1_1.29 J1_1.30 J1_1.31 J1_1.32 J1_1.33 J1_1.34 J1_1.35 J1_1.36 J1_1.37 J1_1.38 J1_1.39 J1_1.40 J1_1.41 J1_1.42 J1_1.43 J1_1.44 J1_1.45 J1_1.46 J1_1.47 J2.20 J3.31 P1_1.1 P1_1.2 P2_1.1 P2_2_1.1 P3_1.1 P3_2_1.1 P4_1.1 P4_2_1.1 P5_2_1.1 P21_1.1 P21_1.2 P22_1.1 P22_1.2 R1_1.1 R1_1.2 R2_1.1 R3_1.1 R3_1.2 R4_1.1 R4_1.2 R5_1.1 T1.2 T1.5
copper on no net: | length 120.6
  Top Layer w0.254: 101.225,59.025 v1(101.225,60.012) 101.225,61 ; 101.975,61.05 103,61.05 103.55,61.05 104.075,60.525 104.075,57.75 ; 103,60.3 103,59.3 103.3,59.3 103.6,59 103.6,57.775 103.575,57.75 ; 104.925,59.45 106.075,59.45 106.075,59.025 106.575,58.525 106.575,57.75 ; v1(106.05,60.9) 106.075,60.875 106.075,60.2 106.525,60.2 106.825,59.9 107.225,59.9 ; 107.075,57.75 107.075,58.75 107.225,58.9 107.225,59.9 ; 108.075,57.75 108.075,59.875 ; 108.375,59.9 107.275,59.9 107.225,59.9 ; 109.425,50.9 109.675,50.65 109.675,49.85 110.12,50.295 111.35,50.295 111.895,50.295 112.425,50.825 112.425,51.725 113.125,52.425 113.125,52.775 ; 109.425,51.4 110.675,51.4 110.84,51.565 111.35,51.565 ; 109.425,51.9 110.175,51.9 111.11,52.835 111.35,52.835 ; 109.425,56.4 109.425,57.475 109.7,57.75 109.7,58.55 ; 111.075,56.775 111.075,55.65 111.125,55.6 v1(111.125,55.025) ; 112.025,56.775 112.025,57.025 112.375,57.375 112.375,58.075 ; v1(112.3,54.2) 113.075,54.2 ; 112.425,58.125 v1(112.425,58.675) ; 113.125,53.725 113.125,53.76 ; 113.125,54.74 113.125,53.76 ; 113.15,50.35 113.2,50.3 v1(113.2,49.375) ; 113.15,51.3 113.45,51.3 113.725,51.575 113.725,53.5 113.465,53.76 113.125,53.76 ; 121.95,52.93 123.69,51.19 124.975,51.19 ; 121.95,54.2 122.74,54.2 123.21,53.73 124.975,53.73 ; 121.95,55.47 122.68,55.47 123.41,56.2 124.95,56.2 124.72,55.97 ; 121.95,57.24 123.45,58.74 124.95,58.74
  Bottom Layer w0.254: 106.025,50.6 107.65,50.6 111.15,54.1 v1@112.3,54.1 ; 106.025,55.6 108.95,55.6 109.525,55.025 v1(111.125,55.025) ; v1(106.05,60.9) 111.575,60.9 113.2,59.275 v1(113.2,49.375) ; 111.502,50.447 111.35,50.295 111.305,50.25 109.5,50.25 108.3,49.05 103.925,49.05 101.225,51.75 v1(101.225,60.012) 109.737,60.012 111.075,58.675 v1(112.425,58.675)

## Polygon pours and split planes (outlines as drawn)
GND4 on Top Layer "Gnd4" (solid, pour order 6): 100.125,61.8 114.2,61.8 114.2,48.3 100.125,48.3
GND3 on Top Layer "Gnd3" (solid, pour order 5): 126.25,118.1 126.25,62.7 85.375,62.7 85.375,118.1
GND on Top Layer "Gnd" (solid, pour order 7): 85.375,61.8 99.45,61.8 99.45,48.3 85.375,48.3
GND2 on Top Layer "Gnd2" (solid, pour order 8): 28.5,118.3 84.425,118.3 84.425,48.8 28.5,48.8

## Silkscreen, mask and mechanical layers (free items; w line width, h text height)
Top Overlay:
  text "P2.5" at 114.725,108.375 h0.81 r270
  text "P2.6" at 112.3,108.35 h0.81 r270
  text "P3.7" at 107.175,108.3 h0.81 r270
  text "P4.2" at 99.475,108.275 h0.81 r270
  text "P4.1" at 102.15,108.25 h0.81 r270
  text "P4.0" at 104.575,108.25 h0.81 r270
  text "P2.4" at 117.25,108.2 h0.81 r270
  text "VCC" at 109.75,107.9 h0.81 r270
  text "P2.4" at 54.15,107.675 h0.81 r270
  text "P3.4" at 59.1,107.675 h0.81 r270
  text "P3.7" at 43.8,107.65 h0.81 r270
  text "P2.6" at 48.9,107.65 h0.81 r270
  text "P3.1" at 56.675,107.65 h0.81 r270
  text "P2.3" at 61.625,107.65 h0.81 r270
  text "P2.5" at 51.675,107.625 h0.81 r270
  text "GND" at 46.475,107.2 h0.81 r270
  text "P3.3" at 67,103 h0.81
  text "P4.0" at 36.2,102.9 h0.81
  text "GND" at 73.275,102.675 h0.81
  text "P3.0" at 66.975,100.475 h0.81
  text "P4.1" at 36.175,100.35 h0.81
  text "P3.1" at 122.575,100.275 h0.81
  text "P2.7" at 92.4,100.25 h0.81
  text "GND" at 73.25,100.175 h0.81
  text "P6.0" at 67,98.05 h0.81
  text "P4.2" at 36.15,97.875 h0.81
  text "P3.4" at 122.55,97.75 h0.81
  text "P1.1" at 73.275,97.725 h0.81
  text "P3.5" at 92.375,97.725 h0.81
  text "P5.7" at 66.975,95.525 h0.81
  text "P2.7" at 36.175,95.375 h0.81
  text "P2.3" at 122.575,95.325 h0.81
  text "P3.2" at 92.4,95.3 h0.81
  text "P2.2" at 73.25,95.2 h0.81
  text "GND" at 86.225,95.075 h0.81
  text "P5.6" at 67,92.85 h0.81
  text "P3.3" at 122.55,92.8 h0.81
  text "P3.5" at 36.2,92.775 h0.81
  text "P3.6" at 92.375,92.775 h0.81
  text "P3.4" at 73.3,92.725 h0.81
  text "VCC" at 86.2,92.5 h0.81
  text "P3.0" at 122.6,90.325 h0.81
  text "P2.0" at 92.425,90.3 h0.81
  text "P5.5" at 67,90.275 h0.81
  text "P3.2" at 36.2,90.125 h0.81
  text "RX" at 86.2,90 h0.81
  text "VCC" at 73.275,89.95 h0.81
  text "P4.6" at 67.075,87.8 h0.81
  text "P2.1" at 92.7,87.7 h0.81
  text "P3.6" at 36.175,87.575 h0.81
  text "P2.2" at 122.575,87.55 h0.81
  text "TX" at 86.15,87.4 h0.81
  text "GND" at 92.975,85.275 h0.81
  text "P6.1" at 36.15,85.175 h0.81
  text "P4.5" at 67,85.175 h0.81
  text "P1.3" at 122.65,85.075 h0.81
  text "RST" at 86.15,84.975 h0.81
  text "VCC" at 93,82.8 h0.81
  text "P1.2" at 122.575,82.45 h0.81
  text "TST" at 86.15,82.35 h0.81
  text "GND" at 29.55,82.3 h0.81
  text "P2.2" at 67.1,82.1 h0.81
  text "P6.2" at 36.075,82.075 h0.81
  text "P5.1" at 29.625,79.675 h0.81
  text "P1.1" at 67.075,79.575 h0.81
  text "P4.7" at 36.05,79.55 h0.81
  text "P1.7" at 112.025,78.2 h0.81 r270
  text "P1.4" at 104.45,78.15 h0.81 r270
  text "P1.5" at 106.925,78.15 h0.81 r270
  text "P1.6" at 109.525,78.15 h0.81 r270
  text "P1.0" at 114.575,78.15 h0.81 r270
  text "GND" at 101.85,78.125 h0.81 r270
  text "P1.1" at 117.175,78.125 h0.81 r270
  text "GND" at 99.45,78.1 h0.81 r270
  text "P1.2" at 67.1,77.15 h0.81
  text "P5.0" at 36.075,77.125 h0.81
  text "GND" at 29.55,77.025 h0.81
  text "P1.1" at 67.075,74.625 h0.81
  text "P5.1" at 36.05,74.6 h0.81
  text "VCC" at 29.55,74.425 h0.81
  text "P1.0" at 67.125,72.15 h0.81
  text "P5.2" at 36.1,72.125 h0.81
  text "RX" at 29.55,71.95 h0.81
  text "P5.4" at 67.1,69.375 h0.81
  text "P2.0" at 36.075,69.35 h0.81
  text "TX" at 29.475,69.275 h0.81
  text "P5.3" at 67.175,66.9 h0.81
  text "RST" at 29.425,66.875 h0.81
  text "P2.1" at 36.15,66.875 h0.81
  text "TST" at 29.425,64.275 h0.81
  text "P4.4" at 67.1,64.275 h0.81
  text "GND" at 36.675,64.175 h0.81
  text "P1.5" at 54.025,62.8 h0.81 r270
  text "P1.7" at 58.975,62.8 h0.81 r270
  text "VCC" at 43.675,62.775 h0.81 r270
  text "GND" at 48.775,62.775 h0.81 r270
  text "P1.6" at 56.55,62.775 h0.81 r270
  text "P4.3" at 61.5,62.775 h0.81 r270
  text "P1.4" at 51.55,62.75 h0.81 r270
  text "GND" at 46.3,62.7 h0.81 r270
  text "ED" at 89.275,60.8 h0.81
  text "ED" at 104.025,60.8 h0.81
  text "V" at 85.55,60.075 h0.81
  text "V" at 100.3,60.075 h0.81
  text "T" at 122.7,58.74 h0.81
  text "T" at 116.5,58.7 h0.81
  text "V" at 98.1,56.55 h0.81
  text "V" at 112.85,56.55 h0.81
  text "R" at 122.7,55.74 h0.81
  text "R" at 116.5,55.7 h0.81
  text "V" at 122.7,53.24 h0.81
  text "V" at 116.5,53.2 h0.81
  text "T" at 97.375,52.4 h0.81
  text "T" at 112.125,52.4 h0.81
  text "R" at 97.425,51.175 h0.81
  text "R" at 112.175,51.175 h0.81
  text "G" at 122.7,50.49 h0.81
  text "G" at 116.5,50.45 h0.81
  text "V" at 97.4,49.875 h0.81
  text "V" at 112.15,49.875 h0.81
  text "G" at 97.375,48.625 h0.81
  text "G" at 112.125,48.625 h0.81
Mechanical 1:
  lines w0.254: 85.05,47.9 85.05,119.125 ; 85.2,62.05 126.95,62.05 ; 99.75,47.95 99.8,61.95 ; 114.5,47.95 114.55,61.95 ; 120.8,47.9 120.85,61.9 ; 27.7,47.9 126.95,47.9 126.95,119.125 27.7,119.125 27.7,47.9

## Dimensions
99.8,46.8 to 114.6,47 on Top Overlay
126.95,119.125 to 126.7,62.2 on Top Overlay
26.7,47.1 to 84.5,46.8 on Top Overlay
26.5,119.5 to 26.4,47.9 on Top Overlay